# Altium PCB SENSEI_Base-Board_Clean.PcbDoc (part 1 of 7)
Units mm, origin at the board's own origin, x right, y up, seen from the top; angles counter-clockwise.
Board outline 25.2 x 15.15 mm, 8 copper layers (Top Sig/Pwr, GND1, Sig1, GND2, Sig2, Pwr, GND3, Bot Sig/Pwr), stack 1.53 mm thick; 187 components, 192 nets, 951 pads, 1831 vias.
Unrouted connection lines stored in the file: 214.
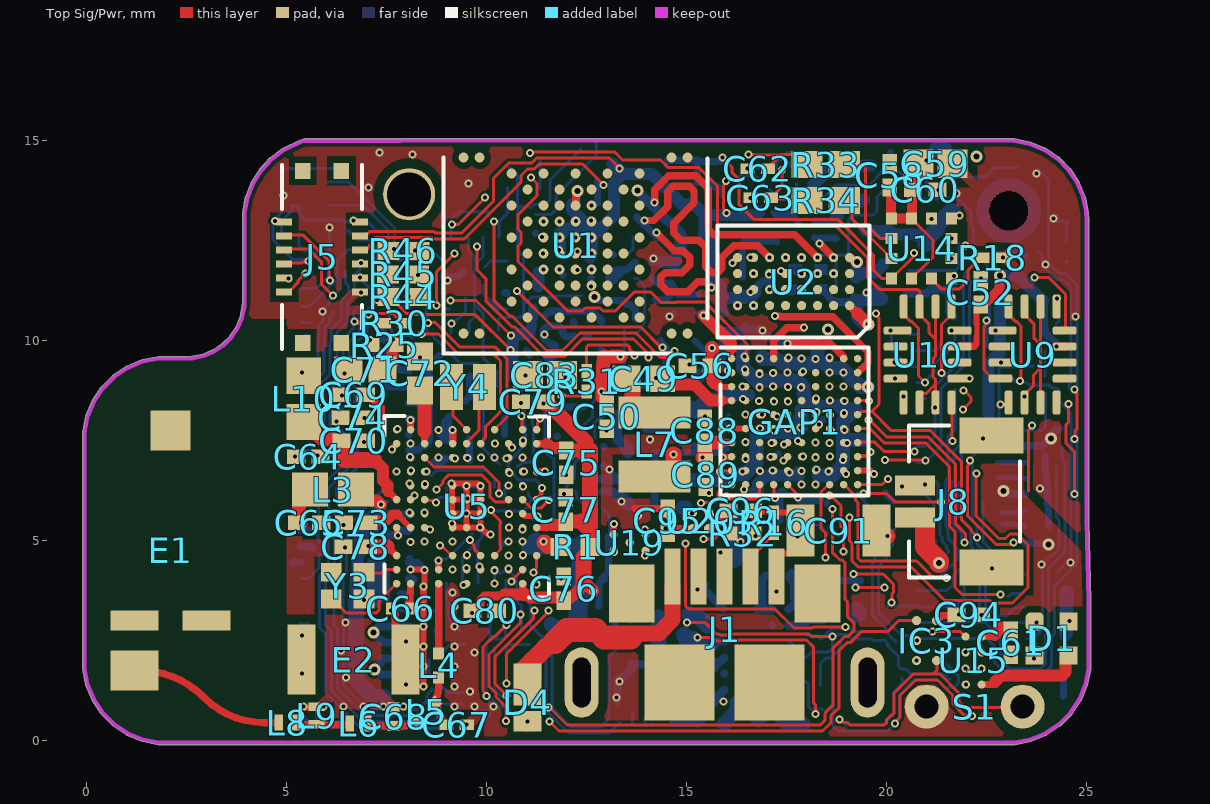
[diagram p0: Top Sig/Pwr view]
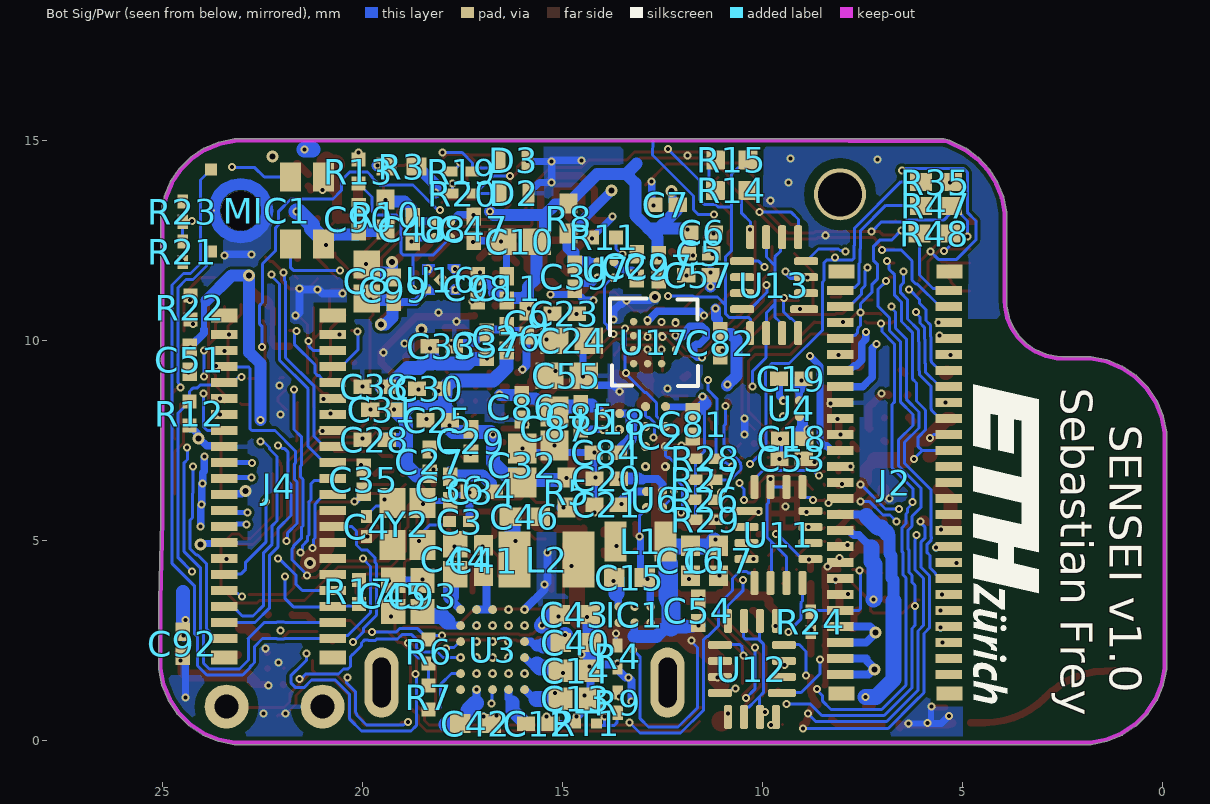
[diagram p1: Bot Sig/Pwr view, seen from below]
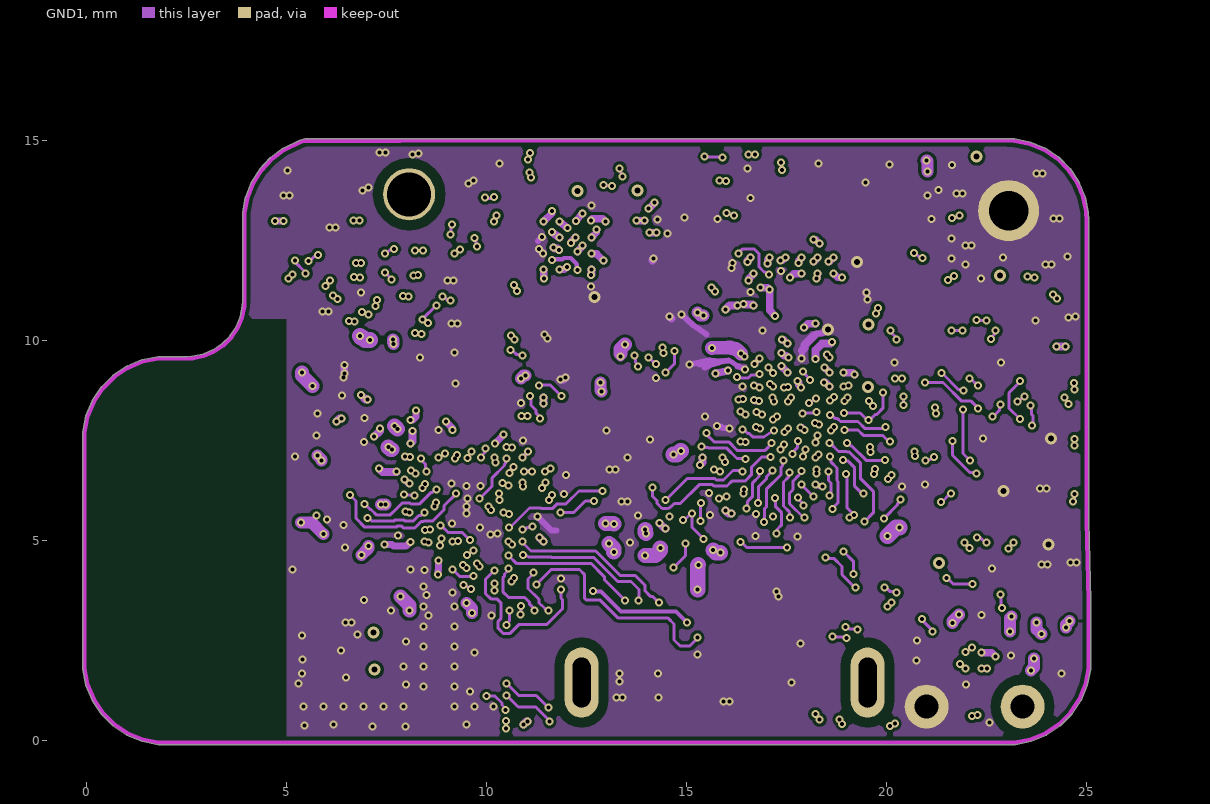
[diagram p2: GND1]
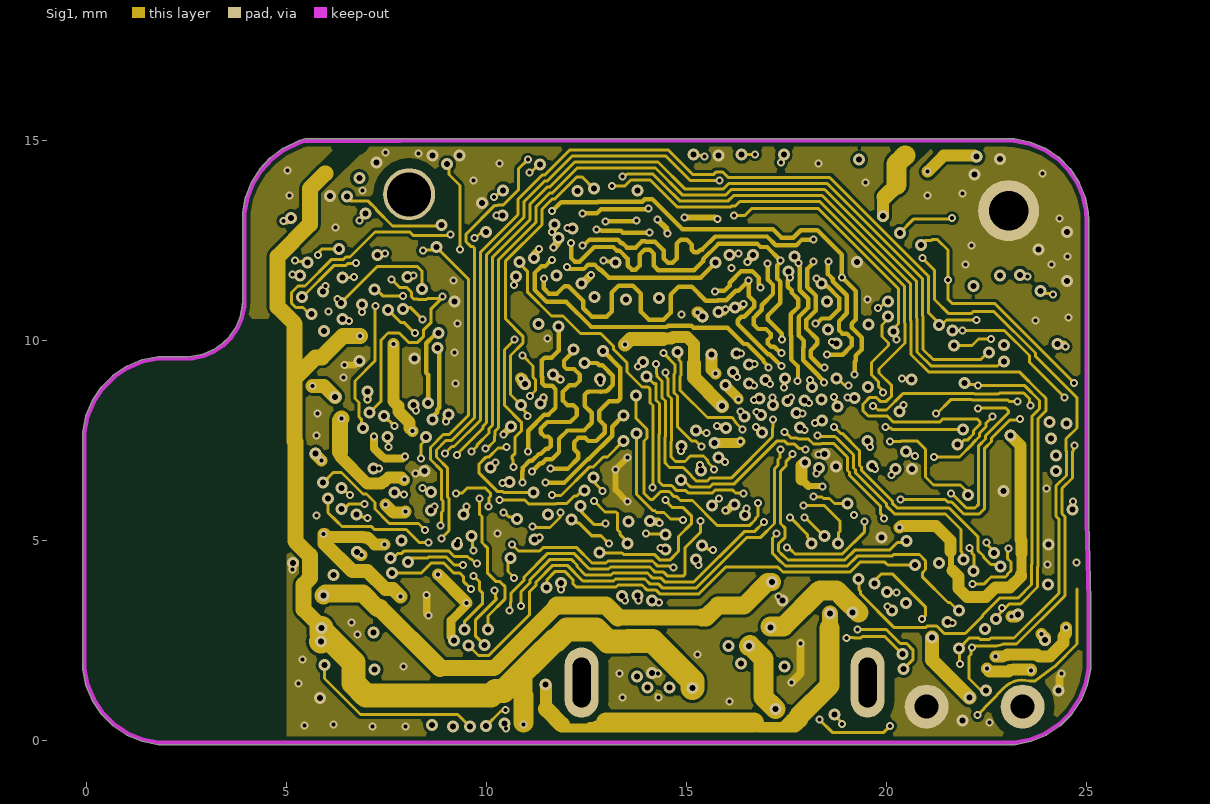
[diagram p3: Sig1]
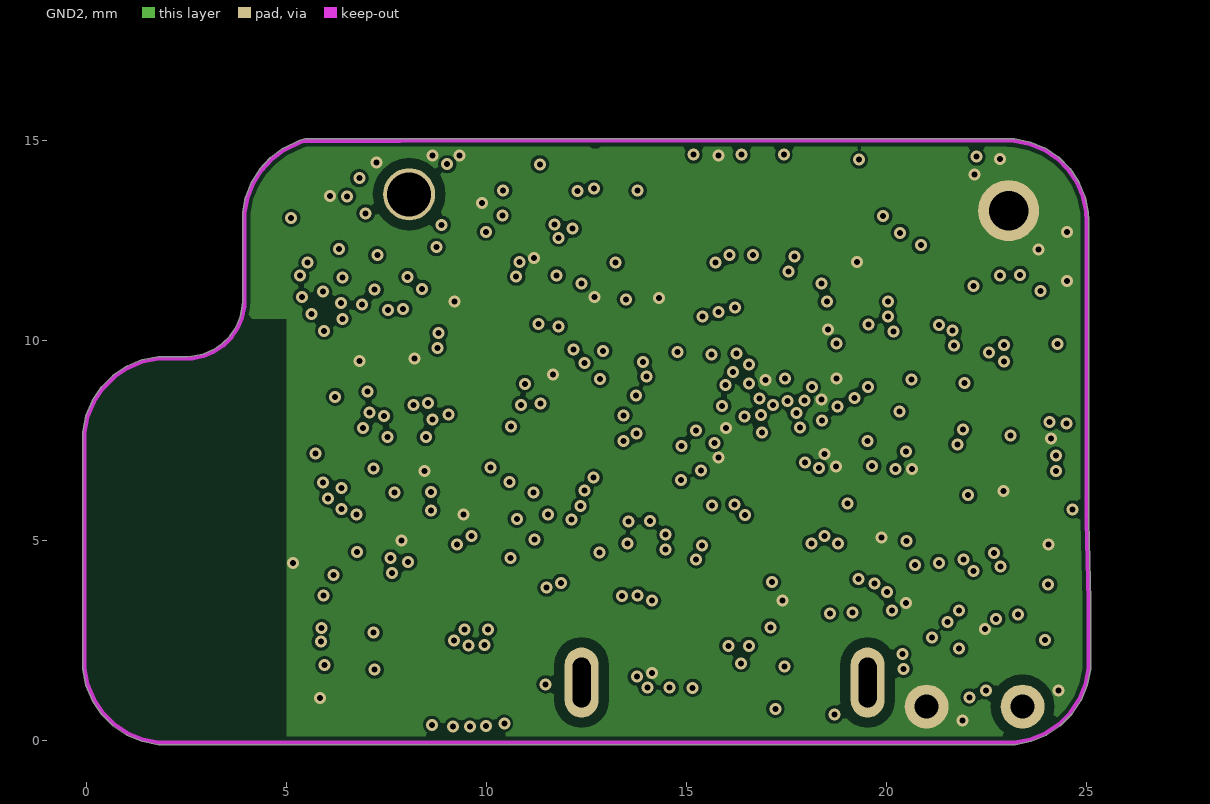
[diagram p4: GND2]
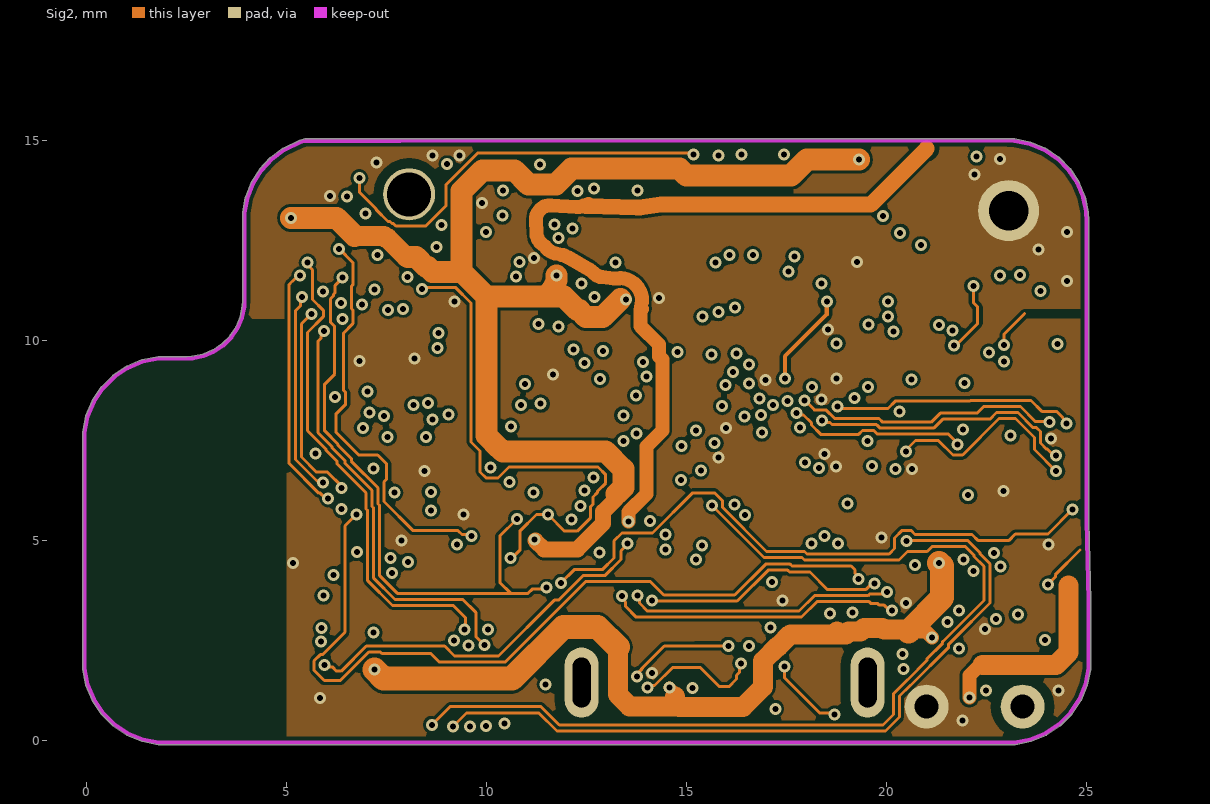
[diagram p5: Sig2]
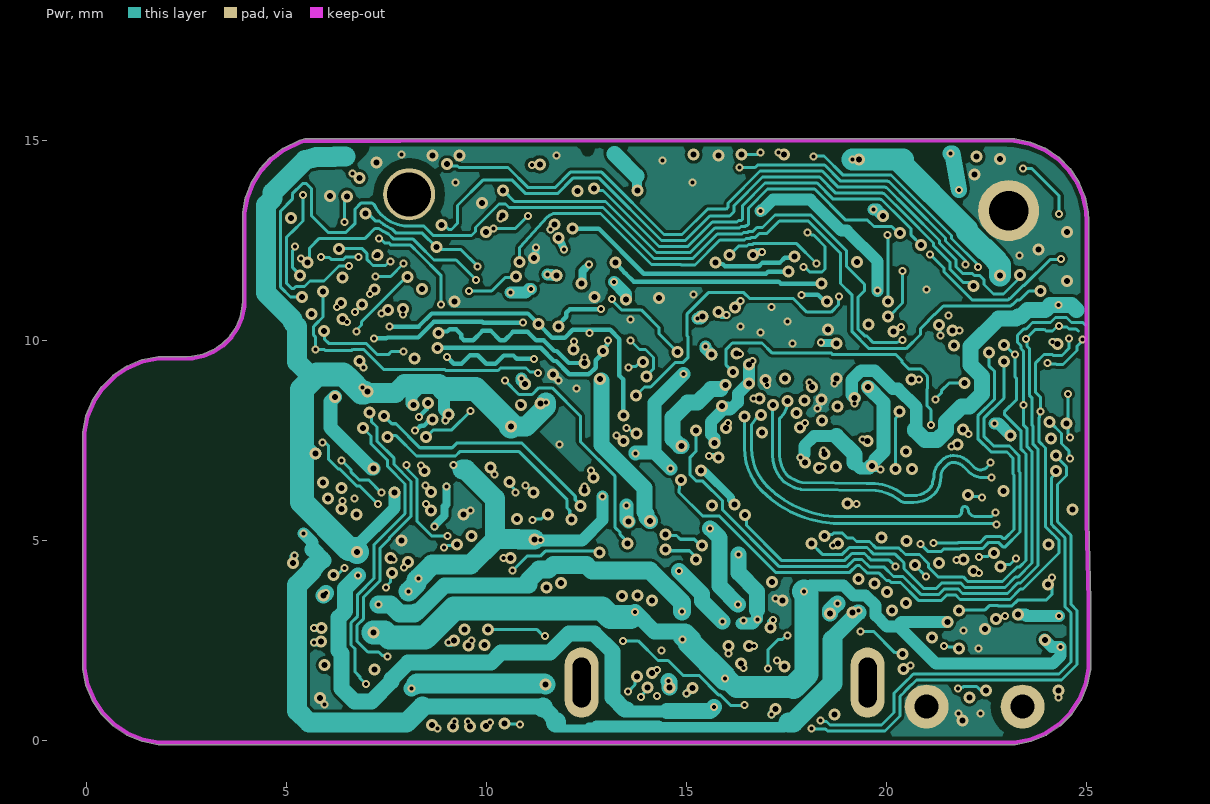
[diagram p6: Pwr]
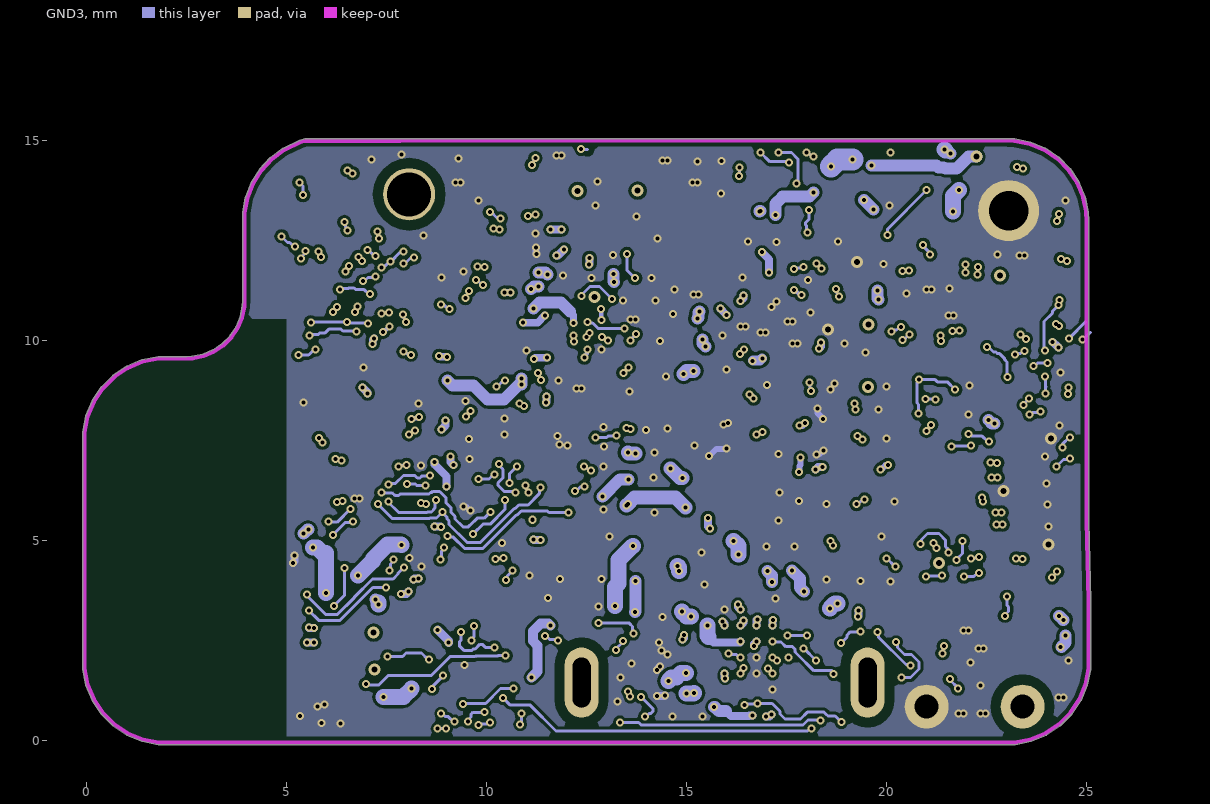
[diagram p7: GND3]

## Layer stack, top to bottom
F.Mask: solder mask 0.0102, Solder Resist, Dk 3.5
Top Sig/Pwr: signal copper 0.035
Dielectric 1: prepreg 0.11, PP-006, Dk 4.29
GND1: signal copper 0.035
Dielectric 2: prepreg 0.11, PP-006, Dk 4.29
Sig1: signal copper 0.035
Dielectric 3: core 0.35, Core-031, Dk 4.4
GND2: signal copper 0.035
Dielectric 4: prepreg 0.11, FR-4, Dk 4.29
Sig2: signal copper 0.035
Dielectric 5: core 0.35, Core-031, Dk 4.4
Pwr: signal copper 0.035
Dielectric 6: prepreg 0.11, PP-006, Dk 4.29
GND3: signal copper 0.035
Dielectric 7: prepreg 0.11, PP-006, Dk 4.29
Bot Sig/Pwr: signal copper 0.035
B.Mask: solder mask 0.0102, Solder Resist, Dk 3.5

## Board outline
-0.021,1.392 -0.1,1.788 cw(c-0.05,1.798) -0.101,1.798 -0.101,2 -0.101,7.5 -0.101,7.702 cw(c-0.05,7.702) -0.1,7.712 -0.021,8.108 cw(c0.028,8.098) -0.018,8.118 0.136,8.49 cw(c0.183,8.471) 0.141,8.499 0.365,8.835 cw(c0.407,8.807) 0.366,8.835 0.365,8.835 cw(c0.407,8.807) 0.372,8.843 0.657,9.128 cw(c0.693,9.093) 0.665,9.135 1.001,9.359 ccw(c1.029,9.317) 1.001,9.359 cw(c1.029,9.317) 1.01,9.364 1.382,9.518 cw(c1.402,9.472) 1.392,9.521 1.788,9.6 cw(c1.798,9.55) 1.798,9.601 2,9.601 2.499,9.601 2.636,9.608 2.906,9.661 3.159,9.766 3.388,9.919 3.581,10.112 3.734,10.341 3.839,10.594 3.892,10.864 3.899,11.001 3.899,13.192 cw(c3.95,13.192) 3.9,13.202 3.972,13.58 cw(c4.021,13.571) 3.974,13.589 4.115,13.947 cw(c4.162,13.929) 4.119,13.956 4.324,14.281 cw(c4.367,14.255) 4.324,14.282 cw(c4.367,14.255) 4.33,14.289 4.592,14.571 cw(c4.629,14.537) 4.592,14.571 cw(c4.629,14.537) 4.599,14.577 4.909,14.805 cw(c4.939,14.765) 4.909,14.806 4.909,14.805 cw(c4.939,14.765) 4.917,14.81 5.33,15.009 cw(c5.352,14.963) 5.339,15.012 5.458,15.044 cw(c5.472,14.995) 5.459,15.044 cw(c5.472,14.995) 5.472,15.046 7.838,15.046 12,15.05 cw(c12,15) 12,15.05 14,15.05 ccw(c14,15) 13.999,15.05 14,15.05 20,15.05 21.901,15.05 23,15.05 cw(c23,15) 23.002,15.05 23.003,15.05 23.002,15.05 cw(c23,15) 23.003,15.05 23.198,15.041 23.199,15.041 ccw(c23.196,14.99) 23.198,15.041 23.199,15.041 cw(c23.196,14.99) 23.206,15.04 23.59,14.963 cw(c23.581,14.914) 23.6,14.96 23.962,14.81 cw(c23.943,14.764) 23.971,14.806 cw(c23.943,14.764) 23.971,14.806 24.297,14.588 cw(c24.269,14.546) 24.297,14.588 cw(c24.269,14.546) 24.305,14.581 24.304,14.582 24.582,14.304 24.581,14.305 cw(c24.546,14.269) 24.588,14.297 cw(c24.546,14.269) 24.588,14.297 24.806,13.971 cw(c24.764,13.943) 24.806,13.971 cw(c24.764,13.943) 24.81,13.962 24.96,13.6 cw(c24.914,13.581) 24.963,13.59 25.04,13.206 cw(c24.99,13.196) 25.041,13.199 25.041,13.198 25.041,13.199 cw(c24.99,13.196) 25.041,13.198 25.05,13.003 cw(c25,13) 25.05,13.002 25.05,13.003 25.05,13.002 cw(c25,13) 25.05,13 25.05,9.5 ccw(c25,9.5) 25.05,9.501 25.05,9.5 25.05,5.501 25.101,3.501 cw(c25.05,3.5) 25.101,3.5 25.101,1.999 cw(c25.05,1.999) 25.101,1.999 25.101,1.798 ccw(c25.05,1.798) 25.101,1.798 cw(c25.05,1.798) 25.1,1.788 cw(c25.05,1.798) 25.1,1.788 25.021,1.392 ccw(c24.971,1.402) 25.021,1.392 cw(c24.971,1.402) 25.018,1.382 24.863,1.009 cw(c24.817,1.028) 24.859,1 24.635,0.665 24.634,0.665 24.635,0.665 cw(c24.592,0.693) 24.628,0.657 24.342,0.372 cw(c24.307,0.407) 24.335,0.365 cw(c24.307,0.407) 24.335,0.365 23.999,0.141 cw(c23.971,0.183) 23.99,0.136 23.617,-0.018 cw(c23.598,0.028) 23.608,-0.021 23.212,-0.1 cw(c23.202,-0.05) 23.202,-0.101 1.798,-0.101 cw(c1.798,-0.05) 1.788,-0.1 1.392,-0.021 cw(c1.402,0.028) 1.383,-0.018 1.009,0.136 cw(c1.029,0.183) 1.001,0.141 cw(c1.029,0.183) 1.001,0.141 0.665,0.365 cw(c0.693,0.407) 0.665,0.366 0.665,0.365 cw(c0.693,0.407) 0.657,0.372 0.372,0.657 cw(c0.407,0.693) 0.365,0.665 0.366,0.665 cw(c0.407,0.693) 0.365,0.665 0.141,1.001 cw(c0.183,1.029) 0.141,1.001 cw(c0.183,1.029) 0.136,1.01 -0.018,1.383 cw(c0.028,1.402)

## Design rules (kind name [scope] priority, off if disabled: settings)
BoardOutlineClearance [All   And  Not   OnSilkscreen] p1: gap=0.2 ignorepadtopadclearanceinfootprint=FALSE except(0.15: Text-OutlineEdge Text-CavityEdge Text-CutoutEdge Text-SplitBarrior Text-SplitContinuation)
Clearance Clearance_MEM [InNetClass('O_SPI') vs InNetClass('O_SPI')] p1: gap=0.075 ignorepadtopadclearanceinfootprint=TRUE
Clearance Clearance_HS [(OnLayer('Top Layer')) AND (InNetClass('HS_OUT')) vs (OnLayer('Top Layer')) AND (InNetClass('HS_OUT'))] p2: gap=0.09 ignorepadtopadclearanceinfootprint=TRUE except(0.18: Arc-Arc Arc-Track Track-Track)
Clearance [All] p3: gap=0.075 ignorepadtopadclearanceinfootprint=TRUE except(0: Arc-Hole Track-Hole SMDPad-Hole THPad-Hole Via-Hole Fill-Hole Poly-Hole Region-Hole Text-Hole; 0.12: SMDPad-Text; 0.15: Fill-Fill Fill-Poly Fill-Region Poly-Poly Poly-Region Region-Region; 0.16: SMDPad-Fill SMDPad-Poly SMDPad-Region; 0.2: Arc-Text Track-Text Via-Text Fill-Text Poly-Text Region-Text Text-Text; 0.25: THPad-THPad THPad-Via THPad-Fill THPad-Poly THPad-Region THPad-Text; 0.5: SMDPad-THPad)
ComponentClearance [All] p1: gap=0.2 collisioncheckmode=3 verticalgap=0.2 showdistances=FALSE
DiffPairsRouting DiffPair_CSI2_CLK [InDifferentialPair('CSI_CLK')] p1: maxlimit=0.203 minlimit=0.1 mostfreqgap=0.203 toplayer_maxgap=0.136 toplayer_prefgap=0.136 toplayer_minwidth=0.125 toplayer_maxwidth=0.125 toplayer_prefwidth=0.125 midlayer1_minwidth=0.075 midlayer1_maxwidth=0.381 midlayer1_prefwidth=0.075 midlayer2_minwidth=0.381 midlayer2_maxwidth=0.381 midlayer2_prefwidth=0.381 midlayer3_minwidth=0.381 midlayer3_maxwidth=0.381 midlayer3_prefwidth=0.381 midlayer4_minwidth=0.075 midlayer4_maxwidth=0.381 midlayer4_prefwidth=0.075 midlayer5_maxgap=0.184 midlayer5_prefgap=0.184 midlayer5_minwidth=0.075 midlayer5_maxwidth=0.075 midlayer5_prefwidth=0.075 midlayer6_maxgap=0.184 midlayer6_prefgap=0.184 midlayer6_minwidth=0.075 midlayer6_maxwidth=0.075 midlayer6_prefwidth=0.075 bottomlayer_maxgap=0.136 bottomlayer_prefgap=0.136 bottomlayer_minwidth=0.125 bottomlayer_maxwidth=0.125 bottomlayer_prefwidth=0.125 maxuncoupledlength=5
DiffPairsRouting DiffPair_CSI2_DO [InDifferentialPair('CSI_D0')] p2: maxlimit=0.203 minlimit=0.1 mostfreqgap=0.203 toplayer_maxgap=0.136 toplayer_prefgap=0.136 toplayer_minwidth=0.125 toplayer_maxwidth=0.125 toplayer_prefwidth=0.125 midlayer1_minwidth=0.075 midlayer1_maxwidth=0.381 midlayer1_prefwidth=0.381 midlayer2_minwidth=0.381 midlayer2_maxwidth=0.381 midlayer2_prefwidth=0.381 midlayer3_minwidth=0.381 midlayer3_maxwidth=0.381 midlayer3_prefwidth=0.381 midlayer4_minwidth=0.075 midlayer4_maxwidth=0.381 midlayer4_prefwidth=0.381 midlayer5_maxgap=0.184 midlayer5_prefgap=0.184 midlayer5_minwidth=0.075 midlayer5_maxwidth=0.075 midlayer5_prefwidth=0.075 midlayer6_maxgap=0.184 midlayer6_prefgap=0.184 midlayer6_minwidth=0.075 midlayer6_maxwidth=0.075 midlayer6_prefwidth=0.075 bottomlayer_maxgap=0.136 bottomlayer_prefgap=0.136 bottomlayer_minwidth=0.125 bottomlayer_maxwidth=0.125 bottomlayer_prefwidth=0.125 maxuncoupledlength=5
DiffPairsRouting DiffPair_CSI2_USB_1 [InDifferentialPair('EXTUSB')] p3: maxlimit=0.203 minlimit=0.127 mostfreqgap=0.203 toplayer_maxgap=0.127 toplayer_prefgap=0.127 toplayer_minwidth=0.156 toplayer_maxwidth=0.156 toplayer_prefwidth=0.156 midlayer5_maxgap=0.127 midlayer5_prefgap=0.127 midlayer5_minwidth=0.079 midlayer5_maxwidth=0.079 midlayer5_prefwidth=0.079 midlayer6_maxgap=0.127 midlayer6_prefgap=0.127 midlayer6_minwidth=0.079 midlayer6_maxwidth=0.079 midlayer6_prefwidth=0.079 bottomlayer_maxgap=0.127 bottomlayer_prefgap=0.127 bottomlayer_minwidth=0.156 bottomlayer_maxwidth=0.156 bottomlayer_prefwidth=0.156 impedanceprofiledriven=TRUE impedanceprofileid={DDCD8725-2C66-4836-9DB9-9B7CF1118B1B} impedanceprofilevalue=90.000000 maxuncoupledlength=5
DiffPairsRouting DiffPair_CSI2_USB_2 [InDifferentialPair('USB')] p4: maxlimit=0.203 minlimit=0.127 mostfreqgap=0.203 toplayer_maxgap=0.127 toplayer_prefgap=0.127 toplayer_minwidth=0.156 toplayer_maxwidth=0.156 toplayer_prefwidth=0.156 midlayer5_maxgap=0.127 midlayer5_prefgap=0.127 midlayer5_minwidth=0.079 midlayer5_maxwidth=0.079 midlayer5_prefwidth=0.079 midlayer6_maxgap=0.127 midlayer6_prefgap=0.127 midlayer6_minwidth=0.079 midlayer6_maxwidth=0.079 midlayer6_prefwidth=0.079 bottomlayer_maxgap=0.127 bottomlayer_prefgap=0.127 bottomlayer_minwidth=0.156 bottomlayer_maxwidth=0.156 bottomlayer_prefwidth=0.156 impedanceprofiledriven=TRUE impedanceprofileid={DDCD8725-2C66-4836-9DB9-9B7CF1118B1B} impedanceprofilevalue=90.000000 maxuncoupledlength=5
Height [All] p1: minheight=0 maxheight=27 prefheight=12.7
HoleSize [All] p1: absolutevalues=TRUE maxlimit=5 minlimit=0.1 maxpercent=80.000 minpercent=20.000
HoleToHoleClearance hole_blind_top [InDrillLayerPair('Top Sig/Pwr - GND1') vs InDrillLayerPair('Top Sig/Pwr - GND1')] p1: gap=0.2 allowstackedmicrovias=FALSE
HoleToHoleClearance hole_buried_top [InDrillLayerPair('GND1 - Sig1') vs InDrillLayerPair('GND1 - Sig1')] p2: gap=0.2 allowstackedmicrovias=FALSE
HoleToHoleClearance hole_buried_bottom [InDrillLayerPair('Pwr - GND3') vs InDrillLayerPair('Pwr - GND3')] p3: gap=0.2 allowstackedmicrovias=FALSE
HoleToHoleClearance hole_blind_bottom [InDrillLayerPair('GND3 - Bot Sig/Pwr') vs InDrillLayerPair('GND3 - Bot Sig/Pwr')] p4: gap=0.2 allowstackedmicrovias=FALSE
HoleToHoleClearance hole_buried_middle [InDrillLayerPair('GND1 - Sig1') vs InDrillLayerPair('Pwr - GND3')] p5: gap=0.3 allowstackedmicrovias=FALSE
HoleToHoleClearance hole_through_hole [InDrillLayerPair('Top Sig/Pwr - GND1') vs InDrillLayerPair('GND3 - Bot Sig/Pwr')] p6: gap=0.35 allowstackedmicrovias=FALSE
MatchedLengths [InNetClass('MEMORIES')] p1: tolerance=1 checknetsindiffpair=FALSE checkdiffpairvsdiffpair=TRUE checkxsignals=TRUE checkothers=TRUE
MatchedLengths MatchedLengths_HSOUT [InNetClass('HS_ML')] p2: tolerance=0.2 checknetsindiffpair=FALSE checkdiffpairvsdiffpair=TRUE checkxsignals=TRUE checkothers=TRUE
MatchedLengths MatchedLengths_HSIN [InNetClass('HS_ML2')] p3: tolerance=0.2 checknetsindiffpair=FALSE checkdiffpairvsdiffpair=TRUE checkxsignals=TRUE checkothers=TRUE
MatchedLengths MatchedLengths_MEMS_PP1 [InxSignalClass('MEMS_PP1')] p4: tolerance=0.1 checknetsindiffpair=FALSE checkdiffpairvsdiffpair=TRUE checkxsignals=TRUE checkothers=TRUE
MatchedLengths MatchedLengths_MEMS_PP2 [InxSignalClass('MEMS_PP2')] p5: tolerance=0.1 checknetsindiffpair=FALSE checkdiffpairvsdiffpair=TRUE checkxsignals=TRUE checkothers=TRUE
MatchedLengths MatchedLengths-diff_1 [InNetClass('CSI2')] p6: tolerance=0.01 checknetsindiffpair=FALSE checkdiffpairvsdiffpair=TRUE checkxsignals=TRUE checkothers=TRUE
MinimumSolderMaskSliver [All] p1: minsoldermaskwidth=0.1
PlaneClearance [All] p1: clearance=0.1
PolygonConnect PolygonConnect_4 [All vs IsNamedPolygon('GND_L08_P025')] p1: thpad.connectstyle=Relief thpad.reliefconductorwidth=0.1 thpad.reliefentries=4 thpad.polygonreliefangle="90 Angle" thpad.airgapwidth=0.254 smdpad.connectstyle=Relief smdpad.reliefconductorwidth=0.1 smdpad.reliefentries=4 smdpad.polygonreliefangle="90 Angle" smdpad.airgapwidth=0.254 via.connectstyle=Direct via.reliefconductorwidth=0.254 via.reliefentries=4 via.polygonreliefangle="90 Angle" via.airgapwidth=0.254
PolygonConnect PolygonConnect_3 [All vs IsNamedPolygon('GND_L08_P025')] p2: thpad.connectstyle=Relief thpad.reliefconductorwidth=0.1 thpad.reliefentries=4 thpad.polygonreliefangle="90 Angle" thpad.airgapwidth=0.254 smdpad.connectstyle=Relief smdpad.reliefconductorwidth=0.254 smdpad.reliefentries=4 smdpad.polygonreliefangle="90 Angle" smdpad.airgapwidth=0.254 via.connectstyle=Relief via.reliefconductorwidth=0.254 via.reliefentries=4 via.polygonreliefangle="90 Angle" via.airgapwidth=0.254
PolygonConnect [Not(OnBottomLayer Or OnTopLayer)] p3: connectstyle=Direct reliefconductorwidth=0.254 reliefentries=4 polygonreliefangle="45 Angle" airgapwidth=0.254
PolygonConnect PolygonConnect_1 [OnBottomLayer] p4: connectstyle=Relief reliefconductorwidth=0.254 reliefentries=4 polygonreliefangle="45 Angle" airgapwidth=0.254
PolygonConnect PolygonConnect_2 [OnTopLayer] p5: connectstyle=Relief reliefconductorwidth=0.254 reliefentries=4 polygonreliefangle="45 Angle" airgapwidth=0.254
RoutingVias via_through_hole [InDrillLayerPair('Top Sig/Pwr - Bot Sig/Pwr')] p1: holewidth=0.15 width=0.3 viastyle="Through Hole" minholewidth=0.15 minwidth=0.3 maxholewidth=0.15 maxwidth=0.3
RoutingVias via_blind_top [InDrillLayerPair('Top Sig/Pwr - GND1')] p2: holewidth=0.1 width=0.2 viastyle="Through Hole" minholewidth=0.1 minwidth=0.2 maxholewidth=0.1 maxwidth=0.2
RoutingVias via_buried_1 [InDrillLayerPair('GND1 - Sig1')] p3: holewidth=0.1 width=0.2 viastyle="Through Hole" minholewidth=0.1 minwidth=0.2 maxholewidth=0.1 maxwidth=0.2
RoutingVias via_buried_middle [InDrillLayerPair('Sig1 - Pwr')] p4: holewidth=0.15 width=0.3 viastyle="Through Hole" minholewidth=0.15 minwidth=0.3 maxholewidth=0.15 maxwidth=0.3
RoutingVias via_buried_2 [InDrillLayerPair('Pwr - GND3')] p5: holewidth=0.1 width=0.2 viastyle="Through Hole" minholewidth=0.1 minwidth=0.2 maxholewidth=0.1 maxwidth=0.2
RoutingVias via_blind_bottom [InDrillLayerPair('GND3 - Bot Sig/Pwr')] p6: holewidth=0.1 width=0.2 viastyle="Through Hole" minholewidth=0.1 minwidth=0.2 maxholewidth=0.1 maxwidth=0.2
SMDNeckDown [All] p1: percent=100.000
SilkToSilkClearance [All] p1: silktosilkclearance=0.1
SilkToSolderMaskClearance [IsPad] p1: minsilkscreentomaskgap=0.1 clearancetoexposedcopper=TRUE
SolderMaskExpansion SolderMaskExpansion_VIA [IsVia] p1: expansion=-0.1 istentingtop=FALSE useseparateexpansions=TRUE expansionbottom=-0.1 istentingbottom=FALSE
SolderMaskExpansion SolderMaskExpansion_1 [All] p2: expansion=0.05 istentingtop=FALSE
ViasUnderSMD [All] p1: allowed=TRUE
Width Width_1 [All] p1: maxlimit=6 minlimit=0.075 preferedwidth=0.075
Width width_50ohm_OSPI [InNetClass('O_SPI')] p2: maxlimit=0.185 minlimit=0.111 preferedwidth=0.185 toplayer_minwidth=0.185 toplayer_prefwidth=0.185 midlayer5_maxwidth=0.111 midlayer5_prefwidth=0.111 midlayer6_maxwidth=0.111 midlayer6_prefwidth=0.111 bottomlayer_minwidth=0.185 bottomlayer_prefwidth=0.185 impedanceprofiledriven=TRUE impedanceprofileid={85A6859E-D439-4C70-89F7-B2343958C511} impedanceprofilevalue=50.000000 minimp=50.000000 maximp=50.000000 favimp=50.000000
Width width_50ohm_QSPI [InNetClass('Q_SPI')] p3: maxlimit=0.185 minlimit=0.111 preferedwidth=0.185 toplayer_minwidth=0.185 toplayer_prefwidth=0.185 midlayer5_maxwidth=0.111 midlayer5_prefwidth=0.111 midlayer6_maxwidth=0.111 midlayer6_prefwidth=0.111 bottomlayer_minwidth=0.185 bottomlayer_prefwidth=0.185 impedanceprofiledriven=TRUE impedanceprofileid={85A6859E-D439-4C70-89F7-B2343958C511} impedanceprofilevalue=50.000000 minimp=50.000000 maximp=50.000000 favimp=50.000000
Width width_50ohm_antenna [InNetClass('50OHM')] p4: maxlimit=0.185 minlimit=0.111 preferedwidth=0.185 toplayer_minwidth=0.185 toplayer_prefwidth=0.185 midlayer5_maxwidth=0.111 midlayer5_prefwidth=0.111 midlayer6_maxwidth=0.111 midlayer6_prefwidth=0.111 bottomlayer_minwidth=0.185 bottomlayer_prefwidth=0.185 impedanceprofiledriven=TRUE impedanceprofileid={85A6859E-D439-4C70-89F7-B2343958C511} impedanceprofilevalue=50.000000 minimp=50.000000 maximp=50.000000 favimp=50.000000
Width Width_100Ohms_1 [InNetClass('CSI2xxx')] p5: maxlimit=0.1 minlimit=0.094 preferedwidth=0.094 toplayer_maxwidth=0.094 midlayer1_minwidth=0.094 midlayer2_minwidth=0.094 midlayer3_minwidth=0.094 midlayer4_minwidth=0.094 midlayer5_minwidth=0.1 midlayer5_prefwidth=0.1 midlayer6_minwidth=0.1 midlayer6_prefwidth=0.1 bottomlayer_minwidth=0.094 bottomlayer_maxwidth=0.094 minimp=50.000000 maximp=50.000000 favimp=50.000000
21 further rules are at their usual default settings.

## Classes and differential pairs
net class Q_SPI: nRF_QSPI_CLK nRF_QSPI_IO0 nRF_QSPI_IO1 nRF_QSPI_IO2 nRF_QSPI_IO3
net class CSI2_DATA: CSI_D0_N CSI_D0_P
net class CSI2_CLK: CSI_CLK_N CSI_CLK_P
net class 50OHM: GND NetC67_1 NetC68_1 NetE1_1 NetL4_1 NetL6_2
component class 09_SHARED_PERIPHERAL: C58 C59 C60 C61 C62 C63 C92 D1 D2 D3 R18 R19 R20 R33 R34 U14 U15
component class 08_nRF_RAM: C82 C83 R31 U17
component class 05_GAP_MIC: C90 MIC1 R17 R21 R23
component class 07_nRF_GPIO: C81 IC2 R26 R27 R28 R29 R30 Y4
component class 04_GAP_GPIO: C51 C52 C53 C54 C57 R14 R15 U9 U10 U11 U12 U13
component class 10_CONNECTOR: D4 J1 J2 J4 J5 J8 R16 R35 R44 R45 R46 R47 R48 U19
component class 06_nRF_POWER_SWD_RF: C64 C65 C66 C67 C68 C69 C70 C71 C72 C73 C74 C75 C76 C77 C78 C79 C80 E1 E2 L3 L4 L5 L6 L8 L9 L10 R24 R25 U5 Y3
component class 02_GAP_JTAG_XTALs: C3 C4 R22 Y2
net class O_SPI: OSPI_0 OSPI_1 OSPI_2 OSPI_3 OSPI_4 OSPI_5 OSPI_6 OSPI_7 OSPI_CLK OSPI_DS
component class 03_GAP_MEM: C5 C6 C7 C8 C9 C10 C11 C97 C98 C99 R12 U1 U2 U16
component class 01_GAP_POWER: C23 C24 C25 C26 C27 C28 C29 C30 C31 C32 C33 C34 C35 C36 C37 C38 C49 C50 C55 C56 C86 C87 C88 C89 GAP1 L7
component class 00_POWER: C12 C13 C14 C15 C16 C17 C18 C19 C20 C21 C22 C39 C40 C41 C42 C43 C44 C45 C46 C47 C48 C84 C85 C91 C93 C94 C95 C96 IC1 IC3 L1 L2 R1 R3 R4 R5 R6 R7 R8 R9 R10 R11 R13 R32 RT1 S1 U3 U4 U6 U7 U8 U18 U20
differential pair EXTUSB: +EXTUSB_P -EXTUSB_N
differential pair CSI_D0: +CSI_D0_P -CSI_D0_N
differential pair CSI_CLK: +CSI_CLK_P -CSI_CLK_N
differential pair USB: +USB_P -USB_N

## Components (designator, comment, footprint, x,y, rotation, side; value= is the part's Value field where it differs from the comment)
C3 "CBR02C200F5GAC" CAPC6333_33N_KEM-L 17.574,5.475 r180 bottom
C4 "CBR02C200F5GAC" CAPC6333_33N_KEM-L 19.9,5.351 r270 bottom
C5 "CL03A105KP3NSNC" FP-CL03-IPC_B 11.587,12.18 r180 bottom
C6 "CL03A105KP3NSNC" FP-CL03-IPC_B 11.524,12.691 r180 bottom
C7 "CL03A105KP3NSNC" FP-CL03-IPC_B 12.425,13.4 r0 bottom
C8 "C1005X5R0J475K050BC" FP-C1005-050-0_15-IPC_B 19.9,11.477 r90 bottom
C9 "GRM033Z71C104KE14D" FP-GRM033-0_03-IPC_B 15.9,10.429 r270 bottom
C10 "C1005X5R0J475K050BC" FP-C1005-050-0_15-IPC_B 16.075,12.475 r0 bottom
C11 "GRM033Z71C104KE14D" FP-GRM033-0_03-IPC_B 16.4,11.304 r90 bottom
C12 "CL03A105KP3NSNC" FP-CL03-IPC_B 15.612,0.425 r180 bottom
C13 "C1005X5R0J475K050BC" FP-C1005-050-0_15-IPC_C 14.675,1.05 r180 bottom
C14 "C1005X5R0J475K050BC" FP-C1005-050-0_15-IPC_C 14.675,1.75 r180 bottom
C15 "CL05A226MQ5QUNC" FP-CL746-IPC_C 13.326,4.073 r180 bottom
C16 "CL05A226MQ5QUNC" FP-CL746-IPC_C 11.8,4.496 r270 bottom
C17 "CL05A226MQ5QUNC" FP-CL746-IPC_C 11.1,4.496 r270 bottom
C18 "CL03A105KP3NSNC" FP-CL03-IPC_B 9.263,7.551 r0 bottom
C19 "GRM033Z71C104KE14D" FP-GRM033-0_03-IPC_B 9.283,9.045 r0 bottom
C20 "CL03A105KP3NSNC" FP-CL03-IPC_B 13.9,6.55 r0 bottom
C21 "GRM033Z71C104KE14D" FP-GRM033-0_03-IPC_B 13.9,5.9 r0 bottom
C22 "CL03A105KP3NSNC" FP-CL03-IPC_B 13.15,11.854 r90 bottom
C23 "CL03A105KP3NSNC" FP-CL03-IPC_B 14.95,10.675 r180 bottom
C24 "C1005X5R0J475K050BC" FP-C1005-050-0_15-IPC_B 14.775,10 r180 bottom
C25 "GRM033Z71C104KE14D" FP-GRM033-0_03-IPC_B 18.119,8.011 r0 bottom
C26 "GRM033Z71C104KE14D" FP-GRM033-0_03-IPC_B 16.4,10.054 r90 bottom
C27 "GRM033Z71C104KE14D" FP-GRM033-0_03-IPC_B 18.319,6.974 r90 bottom
C28 "GRM033Z71C104KE14D" FP-GRM033-0_03-IPC_B 19.7,7.525 r0 bottom
C29 "GRM033Z71C104KE14D" FP-GRM033-0_03-IPC_B 17.29,7.48 r270 bottom
C30 "GRM033Z71C104KE14D" FP-GRM033-0_03-IPC_B 18.332,8.796 r0 bottom
C31 "GRM033Z71C104KE14D" FP-GRM033-0_03-IPC_B 19.503,8.268 r0 bottom
C32 "CL05A106MP5NUNC" FP-CL05A106MP5NUNC-IPC_B 16.007,6.878 r90 bottom value=10uF
C33 "GRM033Z71C104KE14D" FP-GRM033-0_03-IPC_B 18.015,9.856 r180 bottom
C34 "GRM033Z71C104KE14D" FP-GRM033-0_03-IPC_B 17.017,6.227 r0 bottom
C35 "GRM033Z71C104KE14D" FP-GRM033-0_03-IPC_B 19.975,6.525 r270 bottom
C36 "GRM033Z71C104KE14D" FP-GRM033-0_03-IPC_B 17.808,6.293 r270 bottom
C37 "GRM033Z71C104KE14D" FP-GRM033-0_03-IPC_B 16.9,9.9 r90 bottom
C38 "GRM033Z71C104KE14D" FP-GRM033-0_03-IPC_B 19.702,8.846 r0 bottom
C39 "GRM033Z71C104KE14D" FP-GRM033-0_03-IPC_B 14.7,11.6 r270 bottom
C40 "CL05A226MQ5QUNC" FP-CL746-IPC_C 14.671,2.45 r180 bottom
C41 "CL05A226MQ5QUNC" FP-CL746-IPC_C 16.975,4.5 r90 bottom
C42 "CL05A226MQ5QUNC" FP-CL746-IPC_C 17.175,0.425 r0 bottom
C43 "CL05A226MQ5QUNC" FP-CL746-IPC_C 14.696,3.15 r180 bottom
C44 "CL05A106MP5NUNC" FP-CL05A106MP5NUNC-IPC_C 17.684,4.531 r90 bottom value=10uF
C45 "GRM155C70J225KE11D" FP-GRM155-0_2-IPC_C 19.234,3.618 r90 bottom
C46 "GRM033R71E332KA12D" FP-GRM033-0_03-IPC_A 15.95,5.6 r180 bottom
C47 "CL03A105KP3NSNC" FP-CL03-IPC_B 17.225,12.8 r270 bottom
C48 "GRM033Z71C104KE14D" FP-GRM033-0_03-IPC_B 18.75,12.779 r270 bottom
C49 "C1005X5R0J475K050BC" FP-C1005-050-0_15-IPC_B 13.925,9.05 r0 top
C50 "GRM033Z71C104KE14D" FP-GRM033-0_03-IPC_B 13,8.1 r270 top
C51 "CL03A105KP3NSNC" FP-CL03-IPC_B 24.317,9.525 r270 bottom
C52 "CL03A105KP3NSNC" FP-CL03-IPC_B 22.35,11.204 r90 top
C53 "CL03A105KP3NSNC" FP-CL03-IPC_B 9.276,7.046 r0 bottom
C54 "CL03A105KP3NSNC" FP-CL03-IPC_B 11.604,3.242 r90 bottom
C55 "C1005X5R0J475K050BC" FP-C1005-050-0_15-IPC_B 14.9,9.125 r180 bottom
C56 "GRM033Z71C104KE14D" FP-GRM033-0_03-IPC_B 15.325,9.375 r180 top
C57 "CL03A105KP3NSNC" FP-CL03-IPC_B 11.605,11.635 r0 bottom
C58 "GRM033Z71C104KE14D" FP-GRM033-0_03-IPC_B 20.08,14.129 r90 top
C59 "CL05A106MP5NUNC" FP-CL05A106MP5NUNC-IPC_B 21.22,14.423 r0 top value=10uF
C60 "GRM033Z71C104KE14D" FP-GRM033-0_03-IPC_B 20.967,13.775 r0 top
C61 "GRM033Z71C104KE14D" FP-GRM033-0_03-IPC_B 23.1,2.45 r270 top
C62 "GRM0335C1H111JA01D" FP-GRM033-0_03-IPC_C 16.777,14.3 r180 top
C63 "GRM0335C1H111JA01D" FP-GRM033-0_03-IPC_C 16.86,13.573 r180 top
C64 "CL03A105KP3NSNC" FP-CL03-IPC_B 5.546,7.1 r180 top
C65 "CL03A105KP3NSNC" FP-CL03-IPC_B 5.56,5.45 r0 top
C66 "GRM033R71C222KA88D" FP-GRM033-0_03-MFG 7.85,3.3 r180 top
C67 "GJM0335C1ER70BB01D" FP-GJM033-0_03-IPC_C 9.25,0.4 r0 top
C68 "DNF" FP-GRM033-0_03-MFG 7.675,0.6 r90 top
C69 "CL03A105KP3NSNC" FP-CL03-IPC_B 6.675,8.65 r180 top
C70 "CL03A105KP3NSNC" FP-CL03-IPC_B 6.675,7.5 r0 top
C71 "C1005X5R0J475K050BC" FP-C1005-050-0_15-IPC_B 6.966,9.267 r180 top
C72 "C1005X5R0J475K050BC" FP-C1005-050-0_15-IPC_B 8.335,9.177 r90 top
C73 "GRM033Z71C104KE14D" FP-GRM033-0_03-IPC_B 6.735,5.45 r180 top
C74 "CL03A105KP3NSNC" FP-CL03-IPC_B 6.65,8.075 r0 top
C75 "GRM033Z71C104KE14D" FP-GRM033-0_03-IPC_B 11.985,6.95 r270 top
C76 "GRM033Z71C104KE14D" FP-GRM033-0_03-IPC_B 11.925,3.8 r90 top
C77 "GRM033Z71C104KE14D" FP-GRM033-0_03-IPC_B 11.975,5.775 r90 top
C78 "GRM033Z71C104KE14D" FP-GRM033-0_03-IPC_B 6.725,4.85 r180 top
C79 "GRM033Z71C104KE14D" FP-GRM033-0_03-IPC_B 11.166,8.474 r180 top
C80 "GRM033Z71C104KE14D" FP-GRM033-0_03-IPC_B 9.95,3.25 r0 top
C81 "GRM033Z71C104KE14D" FP-GRM033-0_03-IPC_B 11.75,7.904 r270 bottom
C82 "GRM033Z71C104KE14D" FP-GRM033-0_03-IPC_B 11.063,9.939 r270 bottom
C83 "CL05A106MP5NUNC" FP-CL05A106MP5NUNC-IPC_B 11.457,9.139 r0 top value=10uF
C84 "CL03A105KP3NSNC" FP-CL03-IPC_B 13.925,7.2 r0 bottom
C85 "GRM033Z71C104KE14D" FP-GRM033-0_03-IPC_B 14.55,8.104 r270 bottom
C86 "GRM033Z71C104KE14D" FP-GRM033-0_03-IPC_B 16.025,8.329 r270 bottom
C87 "CL05A106MP5NUNC" FP-CL05A106MP5NUNC-IPC_B 15.2,7.8 r270 bottom value=10uF
C88 "GRM033Z71C104KE14D" FP-GRM033-0_03-IPC_B 15.45,7.75 r90 top
C89 "GRM033Z71C104KE14D" FP-GRM033-0_03-IPC_B 15.475,6.646 r270 top
C90 "GRM033Z71C104KE14D" FP-GRM033-0_03-IPC_B 20.1,13.029 r90 bottom
C91 "GRM21BR60G107ME11L" FP-GRM21B-0_2-e0_2_0_7-MFG 18.8,5.25 r180 top
C92 "CL03A105KP3NSNC" FP-CL03-IPC_B 24.495,2.418 r270 bottom
C93 "GRM155C70J225KE11D" FP-GRM155-0_2-IPC_C 18.5,3.612 r90 bottom
C94 "GRM033Z71C104KE14D" FP-GRM033-0_03-IPC_B 22.054,3.15 r0 top
C95 "CL03A105KP3NSNC" FP-CL03-IPC_B 14.525,5.5 r90 top
C96 "GRM033Z71C104KE14D" FP-GRM033-0_03-IPC_B 16.354,5.75 r0 top
C97 "CL03A105KP3NSNC" FP-CL03-IPC_B 12.6,11.829 r270 bottom
C98 "GRM033Z71C104KE14D" FP-GRM033-0_03-IPC_B 17.125,11.304 r270 bottom
C99 "GRM033Z71C104KE14D" FP-GRM033-0_03-IPC_B 19.225,11.275 r90 bottom
D1 "SML-LX0404SIUPGUSB" SML-LX0404SIUPGUSB 24.125,2.55 r0 top
D2 "TPD1E01B04DPYRQ1" TPD1E01B04DPYRQ1 16.207,13.677 r180 bottom
D3 "TPD1E01B04DPYRQ1" TPD1E01B04DPYRQ1 16.221,14.502 r180 bottom
D4 "NSR20F30NXT5G" ONSC-DSN-2-512AB-01_V 11.025,1.125 r180 top
E1 "NN03-320" NN03-320 0.6,8.25 r90 top
E2 "DNM" U.FL-R-SMT-1(01)_GND_pad_small 5.375,2.025 r0 top
GAP1 "GAP9_MC" GAP9 17.7,7.975 r90 top
IC1 "MAX38643AENT+T" BGA6C40P3X2_142X89X50 13.2,3.15 r180 bottom
IC2 "TS5A3153YZPR" BGA8C50P2X4_89X189X50 12.675,7.6 r180 bottom
IC3 "TS5A3167YZPR" BGA5C50P2X3_89X139X50 21,2.5 r0 top
J1 "USB3076-30-A" CONN_USB3076-30-A_GCT 15.95,1.469 r0 top
J2 "DF40C-50DP-0.4V(51)" CONN_COMBI_50P 6.7,6.45 r0 bottom locked
J4 "DF40C-40DP-0.4V(51)" FP-DF40C-40DP-0_4V_51-MFG 22.1,6.35 r270 bottom
J5 "505066-1222" 5050661222 5.888,12.089 r270 top
J8 "DF52-2S-0.8H(21)" DF522S08H21 21.595,5.975 r90 top locked
L1 "DFE18SAN1R0ME0L" FP-DFE18SAN_E0-MFG 13.05,4.975 r180 bottom
L2 "DFE201210S-1R5M=P2" IND_0805_DFE201210S 15.4,4.525 r180 bottom
L3 "LQM18DN100M70L" FP-LQM18DN_70-IPC_C 6.159,6.275 r0 top
L4 "LQP03HQ2N2B02D" FP-LQP03HQ_02-MFG 8.8,1.875 r270 top
L5 "LQP03HQ2N2B02D" FP-LQP03HQ_02-MFG 8.487,0.712 r225 top
L6 "LQW03AW5N6J00D" FP-LQW03AW_00-MFG 6.8,0.425 r180 top
L7 "DFE201610E-4R7M=P2" FP-DFE201610C-MFG 14.2,7.4 r90 top
L8 "LQW03AW5N6J00D" FP-LQW03AW_00-MFG 5.02,0.45 r180 top
L9 "LQW03AW5N6J00D" FP-LQW03AW_00-MFG 5.75,0.625 r270 top
L10 "LQM18DN100M70L" FP-LQM18DN_70-IPC_C 5.426,8.544 r90 top
MIC1 "MMICT5838-00-012" MMICT5838-00-012 22.346,13.25 r180 bottom
R1 "CRCW04021R00FKEDHP" RESC1005X40X25LL05T10 12.224,4.833 r0 top value="1 Ohm"
R3 "CRCW04021R00FKEDHP" RESC1005X40X25LL05T10 19.025,14.35 r0 bottom value="1 Ohm"
R4 "RK73H1HTTC2202F" RESC0603X26X15LL03T05 13.625,2.1 r90 bottom
R5 "CRCW04021R00FKEDHP" RESC1005X40X25LL05T10 14.9,6.2 r90 bottom value="1 Ohm"
R6 "RC0201FR-07100KL" RESC0201(0603)_L 18.35,2.225 r270 bottom value=100k
R7 "RC0201FR-07100KL" RESC0201(0603)_L 18.35,1.075 r90 bottom value=100k
R8 "CRCW04021R00FKEDHP" RESC1005X40X25LL05T10 14.85,13.05 r90 bottom value="1 Ohm"
R9 "RMCF0201FT10K0" FP-RMCF0201-IPC_C 13.625,0.95 r90 bottom
R10 "CRCW04021R00FKEDHP" RESC1005X40X25LL05T10 19.425,13.15 r270 bottom value="1 Ohm"
R11 "ERJ-1GNJ105C" RESC0201(0603)_L 13.963,12.575 r180 bottom value=1M
R12 "ERJ-1GNJ105C" RESC0201(0603)_L 24.325,8.175 r90 bottom value=1M
R13 "ERJ-1GNJ105C" RESC0201(0603)_L 20.1,14.225 r270 bottom value=1M
R14 "RR0510P-104-D" FP-RR0510-IPC_C 10.775,13.751 r0 bottom
R15 "RR0510P-104-D" FP-RR0510-IPC_C 10.769,14.513 r0 bottom
R16 "DNM" 0201 17.175,5.45 r90 top
R17 "ERJ-1GNJ105C" RESC0201(0603)_L 20.093,3.72 r270 bottom value=1M
R18 "DNF" FP-RMCF0201-IPC_C 22.65,12.075 r180 top
R19 "ERJ-1GNF4990C" RESC0603X26X15LL03T05 17.525,14.225 r0 bottom
R20 "ERJ-1GNF4990C" RESC0603X26X15LL03T05 17.5,13.675 r0 bottom
R21 "DNF" FP-RMCF0201-IPC_C 24.5,12.221 r270 bottom locked
R22 "RC0201FR-07100KL" RESC0201(0603)_L 24.305,10.825 r90 bottom value="100000.00 Ohm"
R23 "RMCF0201ZT0R00" FP-RMCF0201-IPC_C 24.5,13.225 r270 bottom locked
R24 "RMCF0201FT10K0" FP-RMCF0201-IPC_C 8.8,2.967 r90 bottom
R25 "RC0201FR-072R2L" RESC0201(0603)_L 7.45,9.889 r180 top value=2.2R
R26 "RMCF0201FT10K0" FP-RMCF0201-IPC_C 11.446,6.025 r180 bottom
R27 "RMCF0201FT10K0" FP-RMCF0201-IPC_C 11.429,6.525 r180 bottom
R28 "RMCF0201FT10K0" FP-RMCF0201-IPC_C 11.425,7.05 r180 bottom
R29 "RMCF0201FT10K0" FP-RMCF0201-IPC_C 11.425,5.525 r180 bottom
R30 "DNF" FP-RMCF0201-IPC_C 7.689,10.434 r180 top
R31 "RMCF0201FT10K0" FP-RMCF0201-IPC_C 12.5,8.979 r270 top
R32 "ERJ-1GNJ105C" RESC0201(0603)_L 16.4,5.175 r180 top value=1M
R33 "RMCF0402ZT0R00" FP-RMCF0402-IPC_A 18.475,14.4 r0 top
R34 "RMCF0402ZT0R00" FP-RMCF0402-IPC_A 18.475,13.503 r0 top
R35 "CRCW020149R9FNED" RESC0603X28X15ML05T05 5.669,13.958 r0 bottom
R44 "CRCW020149R9FNED" RESC0603X28X15ML05T05 7.916,11.085 r180 top
R45 "CRCW020149R9FNED" RESC0603X28X15ML05T05 7.91,11.658 r180 top
R46 "CRCW020149R9FNED" RESC0603X28X15ML05T05 7.918,12.242 r0 top
R47 "CRCW020149R9FNED" RESC0603X28X15ML05T05 5.668,13.359 r0 bottom
R48 "CRCW020149R9FNED" RESC0603X28X15ML05T05 5.7,12.674 r180 bottom
RT1 "ERT-JZEG103FA" ERTJZEG103FA 14.412,0.425 r0 bottom
S1 "NanoT160BP" NanoT160BP 21,0.85 r0 top locked
U1 "MX25UM51345GBEI00" MX25UM51345GBEI00 12.225,12.375 r90 top
U2 "APS512XXN-OB9-WB" WLCSP32_APS512XXN-OB9-WB 17.675,11.475 r180 top locked
U3 "MAX77654BENV+T" WLP_30_MAX77654 17.55,1.275 r90 bottom
U4 "TPS22916CYFPR" BGA4C40P2X2_78X78X50 9.283,8.299 r270 bottom
U5 "NRF5340-CLAA-R7" NRF5340_WLCSP 9.5,5.85 r90 top locked
U6 "TPS22916CYFPR" BGA4C40P2X2_78X78X50 12.7,6.025 r180 bottom
U7 "TPS22916CYFPR" BGA4C40P2X2_78X78X50 13.919,11.768 r180 bottom
U8 "TPS22916CYFPR" BGA4C40P2X2_78X78X50 18,12.775 r180 bottom
U9 "TMUX1112RSVR" FP-RSV0016A-MFG 23.65,9.65 r0 top
U10 "TMUX1112RSVR" FP-RSV0016A-MFG 21.025,9.65 r0 top
U11 "TMUX1112RSVR" FP-RSV0016A-MFG 9.6,5.138 r180 bottom
U12 "TMUX1112RSVR" FP-RSV0016A-MFG 10.267,1.789 r0 bottom
U13 "TMUX1112RSVR" FP-RSV0016A-MFG 9.71,11.384 r0 bottom
U14 "LIS2DUXS12TR" QFN_DUXS12_STM 20.875,12.299 r90 top
U15 "IS31FL3194-CLS2-TR" WLCSP_8_P0.4 21.975,2.6 r0 top
U16 "74AUP1G32GX,125" SOT1226-3 18.032,11.525 r90 bottom
U17 "APS12804O-SQRH-WA" APS12804O-SQRH-WA 12.7,9.95 r180 bottom
U18 "TPS22916CYFPR" BGA4C40P2X2_78X78X50 13.775,7.975 r180 bottom
U19 "PESD1USB30Z" WLCSP_5_2-1-2_P0.4 13.575,4.95 r180 top
U20 "TPS22916CYFPR" BGA4C40P2X2_78X78X50 15.35,5.5 r180 top
Y2 "ECS-240-10-47Q-CES-TR" XTAL_ECS-240-10-47Q-CES-TR 18.883,5.412 r90 bottom
Y3 "ECS-320-7-48B-JTM-TR5" Y_ECX-1048 6.525,3.875 r0 top
Y4 "ECS-.327-9-1210-TR" FP-ECX-1210-MFG 9.531,8.839 r180 top

## Footprints (in the part's own frame and the unit in brackets; to place one, negate y for a bottom-side part, rotate by r counter-clockwise, add the part's x,y. Pads: shape width x height; smd on the part's side, far side on the other; paste and mask are expansions set on the pad)
0201 [mm]
  rect 0.354x0.263 smd paste+0 mask+0: 1(-0.254,0) 2(0.254,0)
  body extent -0.3,-0.15 0.3,0.15, height 0.26
5050661222 [mm]
  rect 0.18x0.4 smd: 1(-0.875,-0.95) 2(-0.875,0.95) 3(-0.525,-0.95) 4(-0.525,0.95) 5(-0.175,-0.95) 6(-0.175,0.95) 7(0.175,-0.95) 8(0.175,0.95) 9(0.525,-0.95) 10(0.525,0.95) 11(0.875,-0.95) 12(0.875,0.95)
  rect 0.4x0.385 smd: MP1(-2.155,-0.482) MP2(-2.155,0.482) MP3(2.155,-0.482) MP4(2.155,0.482)
  silkscreen extent -2.3,-1 2.3,1, body extent -2.27,-1 2.27,1, height 0.56
APS12804O-SQRH-WA [mm]
  round 0.19 smd paste+0 mask+0: A1(-0.525,0.525) A2(-0.175,0.525) A3(0.175,0.525) A4(0.525,0.525) B1(-0.525,0.175) B2(-0.175,0.175) B3(0.175,0.175) B4(0.525,0.175) C1(-0.525,-0.175) C2(-0.175,-0.175) C3(0.175,-0.175) C4(0.525,-0.175) D1(-0.525,-0.525) D2(-0.175,-0.525) D3(0.175,-0.525)
  silkscreen extent -1.11,-1.09 1.08,1.11
BGA4C40P2X2_78X78X50 [mm]
  round 0.226 smd: A1(-0.2,0.2) A2(0.2,0.2) B1(-0.2,-0.2) B2(0.2,-0.2)
  body extent -0.39,-0.39 0.39,0.39, height 0.5
BGA5C50P2X3_89X139X50 [mm]
  round 0.226 smd: A1(-0.25,0.5) A2(0.25,0.5) B1(-0.25,0) C1(-0.25,-0.5) C2(0.25,-0.5)
  body extent -0.44,-0.69 0.44,0.69, height 0.5
BGA6C40P3X2_142X89X50 [mm]
  round 0.216 smd: A1(-0.4,0.2) A2(0,0.2) A3(0.4,0.2) B1(-0.4,-0.2) B2(0,-0.2) B3(0.4,-0.2)
  body extent -0.71,-0.44 0.71,0.44, height 0.5
BGA8C50P2X4_89X189X50 [mm]
  round 0.226 smd: A1(-0.25,0.75) A2(0.25,0.75) B1(-0.25,0.25) B2(0.25,0.25) C1(-0.25,-0.25) C2(0.25,-0.25) D1(-0.25,-0.75) D2(0.25,-0.75)
  body extent -0.44,-0.94 0.44,0.94, height 0.5
CAPC6333_33N_KEM-L [mm]
  rect 0.332x0.279 smd paste+0 mask+0: 1(-0.251,0) 2(0.251,0)
  body extent -0.32,-0.17 0.32,0.17, height 0.33
CONN_COMBI_50P [mm] "50Pin 0.4mm pitch connector footprint that accepts (male) connectors intended for different stacking heights:  Hirose - DF40C-50DP-0.4V(51) for 1.5mm - 3mm stacking height , JAE - WP7B-P050VA1-R8000 - for 0.7mm stacking height"
  rect 0.66x0.22 smd: 1(1.355,4.8) 2(1.355,4.4) 3(1.355,4) 4(1.355,3.6) 5(1.355,3.2) 6(1.355,2.8) 7(1.355,2.4) 8(1.355,2) 9(1.355,1.6) 10(1.355,1.2) 11(1.355,0.8) 12(1.355,0.4) 13(1.355,0) 14(1.355,-0.4) 15(1.355,-0.8) 16(1.355,-1.2) 17(1.355,-1.6) 18(1.355,-2) 19(1.355,-2.4) 20(1.355,-2.8) 21(1.355,-3.2) 22(1.355,-3.6) 23(1.355,-4) 24(1.355,-4.4) 25(1.355,-4.8) 26(-1.355,-4.8) 27(-1.355,-4.4) 28(-1.355,-4) 29(-1.355,-3.6) 30(-1.355,-3.2) 31(-1.355,-2.8) 32(-1.355,-2.4) 33(-1.355,-2) 34(-1.355,-1.6) 35(-1.355,-1.2) 36(-1.355,-0.8) 37(-1.355,-0.4) 38(-1.355,0) 39(-1.355,0.4) 40(-1.355,0.8) 41(-1.355,1.2) 42(-1.355,1.6) 43(-1.355,2) 44(-1.355,2.4) 45(-1.355,2.8) 46(-1.355,3.2) 47(-1.355,3.6) 48(-1.355,4) 49(-1.355,4.4) 50(-1.355,4.8)
  rect 0.65x0.35 smd: 56(-1.375,-5.275) 56(-1.375,5.275) 56(1.325,-5.275) 56(1.325,5.275)
  body extent -1.49,-5.74 1.48,5.78, height 1.14
CONN_USB3076-30-A_GCT [mm]
  rect 0.406x1.397 smd paste+0 mask+0: 1(-1.3,2.631) 2(-0.65,2.631) 3(0,2.631) 4(0.65,2.631) 5(1.3,2.631)
  rect 1.143x1.448 smd paste-0.724 mask-0.724: 6(-2.32,2.211) 7(2.32,2.211)
  rect 1.75x1.9 smd paste-0.95 mask-0.953: 8(-1.125,-0.019) 9(1.125,-0.019)
  oval 0.85x1.75 hole 0.45 slot 1.25 at 90 deg mask+0.102: 10(-3.575,-0.019) 11(3.575,-0.019)
  body extent -3.7,-2.78 3.7,2.78, height 2.67
DF522S08H21 [mm]
  rect 0.5x1 smd: 1(-0.4,0.89) 2(0.4,0.89)
  rect 0.9x1.6 smd: 3(-1.65,-1.03) 4(1.65,-1.03)
  silkscreen extent -1.9,-1.74 1.9,1.03, body extent -2.01,-1.74 2.01,1.34, height 1.1
ERTJZEG103FA [mm]
  rect 0.275x0.25 smd: 1(-0.263,0) 2(0.263,0)
  body extent -0.3,-0.15 0.3,0.15, height 0.33
FP-C1005-050-0_15-IPC_B [mm]
  rect 0.705x0.66 smd paste+0 mask+0: 1(-0.427,0) 2(0.427,0)
  body extent -0.5,-0.25 0.5,0.25, height 0.55
FP-C1005-050-0_15-IPC_C [mm]
  rect 0.605x0.56 smd paste+0 mask+0: 1(-0.377,0) 2(0.377,0)
  body extent -0.5,-0.25 0.5,0.25, height 0.55
FP-CL03-IPC_B [mm]
  rect 0.454x0.363 smd paste+0 mask+0: 1(-0.304,0) 2(0.304,0)
  body extent -0.3,-0.15 0.3,0.15, height 0.33
FP-CL05A106MP5NUNC-IPC_B [mm]
  rect 0.756x0.706 smd paste+0 mask+0: 1(-0.425,0) 2(0.425,0)
  body extent -0.5,-0.25 0.5,0.25, height 0.7
FP-CL05A106MP5NUNC-IPC_C [mm]
  rect 0.656x0.606 smd paste+0 mask+0: 1(-0.375,0) 2(0.375,0)
  body extent -0.5,-0.25 0.5,0.25, height 0.7
FP-CL746-IPC_C [mm]
  rect 0.515x0.472 smd paste+0 mask+0: 1(-0.379,0) 2(0.379,0)
  body extent -0.5,-0.25 0.5,0.25, height 0.55
FP-DF40C-40DP-0_4V_51-MFG [mm]
  rect 0.23x0.66 smd paste-1000 mask+0: 1(-3.8,-1.355) 2(-3.8,1.355) 3(-3.4,-1.355) 4(-3.4,1.355) 5(-3,-1.355) 6(-3,1.355) 7(-2.6,-1.355) 8(-2.6,1.355) 9(-2.2,-1.355) 10(-2.2,1.355) 11(-1.8,-1.355) 12(-1.8,1.355) 13(-1.4,-1.355) 14(-1.4,1.355) 15(-1,-1.355) 16(-1,1.355) 17(-0.6,-1.355) 18(-0.6,1.355) 19(-0.2,-1.355) 20(-0.2,1.355) 21(0.2,-1.355) 22(0.2,1.355) 23(0.6,-1.355) 24(0.6,1.355) 25(1,-1.355) 26(1,1.355) 27(1.4,-1.355) 28(1.4,1.355) 29(1.8,-1.355) 30(1.8,1.355) 31(2.2,-1.355) 32(2.2,1.355) 33(2.6,-1.355) 34(2.6,1.355) 35(3,-1.355) 36(3,1.355) 37(3.4,-1.355) 38(3.4,1.355) 39(3.8,-1.355) 40(3.8,1.355)
  rect 0.35x0.66 smd paste+0 mask+0: 41(-4.275,1.355) 42(4.275,1.355) 43(-4.275,-1.355) 44(4.275,-1.355)
  body extent -4.76,-1.49 4.76,1.49, height 1.29
FP-DFE18SAN_E0-MFG [mm]
  rect 0.55x1 smd paste+0 mask+0: 1(-0.625,0) 2(0.625,0)
  body extent -0.8,-0.4 0.8,0.4, height 0.8
FP-DFE201610C-MFG [mm]
  rect 0.8x1.8 smd paste+0 mask+0: 1(-0.8,0) 2(0.8,0)
  body extent -1,-0.8 1,0.8, height 1
FP-ECX-1210-MFG [mm]
  rect 0.575x1.14 smd paste+0 mask+0: 1(-0.413,0) 2(0.413,0)
  body extent -0.8,-0.67 0.8,0.67, height 0.25
FP-GJM033-0_03-IPC_C [mm]
  rect 0.354x0.263 smd paste+0 mask+0: 1(-0.254,0) 2(0.254,0)
  body extent -0.53,-0.27 0.53,0.26, height 0.25
FP-GRM21B-0_2-e0_2_0_7-MFG [mm]
  rect 0.7x1.3 smd paste+0 mask+0: 1(-0.95,0) 2(0.95,0)
  body extent -1,-0.63 1,0.63, height 1.45
FP-GRM033-0_03-IPC_A [mm]
  rect 0.554x0.463 smd paste+0 mask+0: 1(-0.354,0) 2(0.354,0)
  body extent -0.3,-0.15 0.3,0.15, height 0.33
FP-GRM033-0_03-IPC_B [mm]
  rect 0.454x0.363 smd paste+0 mask+0: 1(-0.304,0) 2(0.304,0)
  body extent -0.3,-0.15 0.3,0.15, height 0.33
FP-GRM033-0_03-IPC_C [mm]
  rect 0.354x0.263 smd paste+0 mask+0: 1(-0.254,0) 2(0.254,0)
  body extent -0.53,-0.27 0.53,0.27, height 0.25
FP-GRM033-0_03-MFG [mm]
  rect 0.25x0.3 smd paste+0 mask+0: 1(-0.238,0) 2(0.238,0)
  body extent -0.46,-0.27 0.46,0.27, height 0.25
FP-GRM155-0_2-IPC_C [mm]
  rect 0.628x0.606 smd paste+0 mask+0: 1(-0.389,0) 2(0.389,0)
  body extent -0.5,-0.25 0.5,0.25, height 0.7
FP-LQM18DN_70-IPC_C [mm]
  rect 0.906x0.858 smd paste+0 mask+0: 1(-0.576,0) 2(0.576,0)
  body extent -1.13,-0.58 1.13,0.58, height 0.25
FP-LQP03HQ_02-MFG [mm]
  rect 0.3x0.275 smd paste+0 mask+0: 1(-0.3,0) 2(0.3,0)
  body extent -0.55,-0.27 0.55,0.26, height 0.25
FP-LQW03AW_00-MFG [mm]
  rect 0.21x0.4 smd paste+0 mask+0: 1(-0.22,0) 2(0.22,0)
  body extent -0.43,-0.33 0.43,0.33, height 0.25
FP-RMCF0201-IPC_C [mm]
  rect 0.354x0.263 smd paste+0 mask+0: 1(-0.254,0) 2(0.254,0)
  body extent -0.3,-0.15 0.3,0.15, height 0.26
FP-RMCF0402-IPC_A [mm]
  rect 0.781x0.672 smd paste+0 mask+0: 1(-0.466,0) 2(0.466,0)
  body extent -1.06,-0.54 1.06,0.54, height 0.25
FP-RR0510-IPC_C [mm]
  rect 0.468x0.472 smd paste+0 mask+0: 1(-0.402,0) 2(0.402,0)
  body extent -0.5,-0.25 0.5,0.25, height 0.4
FP-RSV0016A-MFG [mm]
  rrect50% 0.7x0.2 smd paste+0 mask+0: 1(-0.75,0.6)
  rrect50% 0.6x0.2 smd paste+0 mask+0: 2(-0.8,0.2) 3(-0.8,-0.2) 4(-0.8,-0.6) 9(0.8,-0.6) 10(0.8,-0.2) 11(0.8,0.2) 12(0.8,0.6)
  rrect50% 0.2x0.6 smd paste+0 mask+0: 5(-0.6,-1.2) 6(-0.2,-1.2) 7(0.2,-1.2) 8(0.6,-1.2) 13(0.6,1.2) 14(0.2,1.2) 15(-0.2,1.2) 16(-0.6,1.2)
  body extent -1.2,-1.6 1.2,1.6, height 0.25
GAP9 [mm]
  round 0.185 smd paste-0.005 mask+0: A1(-1.575,1.575) A2(-1.225,1.575) A3(-0.875,1.575) A4(-0.525,1.575) A7(0.525,1.575) A8(0.875,1.575) A9(1.225,1.575) A10(1.575,1.575) B1(-1.575,1.225) B2(-1.225,1.225) B3(-0.875,1.225) B4(-0.525,1.225) B5(-0.175,1.225) B6(0.175,1.225) B7(0.525,1.225) B8(0.875,1.225) B9(1.225,1.225) B10(1.575,1.225) C1(-1.575,0.875) C2(-1.225,0.875) C3(-0.875,0.875) C4(-0.525,0.875) C5(-0.175,0.875) C6(0.175,0.875) C7(0.525,0.875) C8(0.875,0.875) C9(1.225,0.875) C10(1.575,0.875) D1(-1.575,0.525) D2(-1.225,0.525) D3(-0.875,0.525) D4(-0.525,0.525) D5(-0.175,0.525) D6(0.175,0.525) D7(0.525,0.525) D8(0.875,0.525) D9(1.225,0.525) D10(1.575,0.525) E1(-1.575,0.175) E2(-1.225,0.175) E3(-0.875,0.175) E4(-0.525,0.175) E5(-0.175,0.175) E6(0.175,0.175) E7(0.525,0.175) E8(0.875,0.175) E9(1.225,0.175) E10(1.575,0.175) F1(-1.575,-0.175) F2(-1.225,-0.175) F3(-0.875,-0.175) F4(-0.525,-0.175) F5(-0.175,-0.175) F6(0.175,-0.175) F7(0.525,-0.175) F8(0.875,-0.175) F9(1.225,-0.175) F10(1.575,-0.175) G1(-1.575,-0.525) G2(-1.225,-0.525) G3(-0.875,-0.525) G4(-0.525,-0.525) G5(-0.175,-0.525) G6(0.175,-0.525) G7(0.525,-0.525) G8(0.875,-0.525) G9(1.225,-0.525) G10(1.575,-0.525) H1(-1.575,-0.875) H2(-1.225,-0.875) H3(-0.875,-0.875) H4(-0.525,-0.875) H5(-0.175,-0.875) H6(0.175,-0.875) H7(0.525,-0.875) H8(0.875,-0.875) H9(1.225,-0.875) H10(1.575,-0.875) J1(-1.575,-1.225) J2(-1.225,-1.225) J3(-0.875,-1.225) J4(-0.525,-1.225) J5(-0.175,-1.225) J6(0.175,-1.225) J7(0.525,-1.225) J8(0.875,-1.225) J9(1.225,-1.225) J10(1.575,-1.225) K1(-1.575,-1.575) K2(-1.225,-1.575) K3(-0.875,-1.575) K4(-0.525,-1.575) K5(-0.175,-1.575) K6(0.175,-1.575) K7(0.525,-1.575) K8(0.875,-1.575) K9(1.225,-1.575) K10(1.575,-1.575)
  silkscreen extent -1.85,-1.85 1.85,1.85, body extent -1.85,-1.85 1.85,1.85, height 0.52
IND_0805_DFE201210S [mm] "0805 Inductor"
  rect 0.8x1.4 smd: 1(-0.8,0) 2(0.8,0)
  body extent -1,-0.64 1,0.64, height 1.02
MMICT5838-00-012 [mm]
  rect 0.522x0.725 smd paste-0.368 mask-0.368: 1(1.37,0.837) 2(0.548,0.837) 6(0.548,-0.837) 7(1.37,-0.837)
  rect 0.051x0.051 smd paste-0.025 mask-0.025: 3(-1.37,0)
  round 0.991 / inner round 1.524 / far side round 0.991 hole 0.991 unplated paste-0.495 mask-0.495: 3(-0.704,0)
  rect 0.3x0.3 smd paste-0.368 mask-0.368: 4(-1.444,1.025) 5(-1.444,-1.025)
  Top Sig/Pwr region: -0.185,0.045 0.106,0.071 0.109,0 0.069,-0.251 -0.046,-0.478 -0.226,-0.658 -0.452,-0.773 -0.704,-0.813 -0.955,-0.773 -1.181,-0.658 -1.361,-0.478 -1.477,-0.251 -1.516,0 -1.513,0.071 -1.222,0.045 -1.224,0 -1.199,-0.161 -1.125,-0.306 -1.01,-0.421 -0.865,-0.495 -0.704,-0.521 -0.543,-0.495 -0.398,-0.421 -0.282,-0.306 -0.208,-0.161 -0.183,0
  Top Sig/Pwr region: -0.185,-0.045 0.106,-0.071 0.109,0 0.069,0.251 -0.046,0.478 -0.226,0.658 -0.452,0.773 -0.704,0.813 -0.955,0.773 -1.181,0.658 -1.361,0.478 -1.477,0.251 -1.516,0 -1.513,-0.071 -1.222,-0.045 -1.224,0 -1.199,0.161 -1.125,0.306 -1.01,0.421 -0.865,0.495 -0.704,0.521 -0.543,0.495 -0.398,0.421 -0.282,0.306 -0.208,0.161 -0.183,0
  body extent -1.74,-1.33 1.76,1.33, height 0.97
MX25UM51345GBEI00 [mm] "WLCSP 68 512 Mbit Flash"
  round 0.25 smd mask-0.02: A1(-2.2,2.8) A12(2.2,2.8) B1(-2.2,2.4) B12(2.2,2.4) D3(-1.4,1.6) D5(-0.6,1.6) D7(0.2,1.6) D9(1,1.6) D11(1.8,1.6) E2(-1.8,1.2) E4(-1,1.2) E6(-0.2,1.2) E8(0.6,1.2) E10(1.4,1.2) F3(-1.4,0.8) F5(-0.6,0.8) F6(-0.2,0.8) F7(0.2,0.8) F8(0.6,0.8) F9(1,0.8) F11(1.8,0.8) G2(-1.8,0.4) G4(-1,0.4) G5(-0.6,0.4) G6(-0.2,0.4) G7(0.2,0.4) G8(0.6,0.4) G9(1,0.4) G10(1.4,0.4) H3(-1.4,0) H4(-1,0) H5(-0.6,0) H6(-0.2,0) H7(0.2,0) H8(0.6,0) H9(1,0) H11(1.8,0) J2(-1.8,-0.4) J4(-1,-0.4) J5(-0.6,-0.4) J6(-0.2,-0.4) J7(0.2,-0.4) J8(0.6,-0.4) J9(1,-0.4) J10(1.4,-0.4) K3(-1.4,-0.8) K4(-1,-0.8) K5(-0.6,-0.8) K6(-0.2,-0.8) K7(0.2,-0.8) K8(0.6,-0.8) K9(1,-0.8) K11(1.8,-0.8) L2(-1.8,-1.2) L4(-1,-1.2) L6(-0.2,-1.2) L8(0.6,-1.2) L10(1.4,-1.2) M2(-1.8,-1.6) M3(-1.4,-1.6) M5(-0.6,-1.6) M7(0.2,-1.6) M9(1,-1.6) M11(1.8,-1.6) P1(-2.2,-2.4) P12(2.2,-2.4) R1(-2.2,-2.8) R12(2.2,-2.8)
  silkscreen extent -2.7,-3.3 2.2,3.3, body extent -2.65,-3.25 2.68,3.25, height 0.51
NanoT160BP [mm]
  round 1.1 hole 0.6: 1(0,0) 2(2.4,0)
  body extent 0.05,-1.5 2.35,0.15, height 0.46
NN03-320 [mm]
  rect 1x1.2 smd: 1(-6.5,-0.6)
  rect 0.5x1.2 smd: 2(-5.25,-0.6) 3(-5.25,-2.4)
  rect 1x1 smd: 4(-0.5,-1.5)
  body extent -7,-3 0,0, height 2.01
NRF5340_WLCSP [mm]
  round 0.19 smd paste+0 mask+0: A1(-1.925,1.75) A2(-1.575,1.75) A3(-1.225,1.75) A5(-0.525,1.75) A7(0.175,1.75) A9(0.875,1.75) A11(1.575,1.75) A12(1.925,1.75) B1(-1.925,1.4) B2(-1.575,1.4) B4(-0.875,1.4) B5(-0.525,1.4) B6(-0.175,1.4) B7(0.175,1.4) B8(0.525,1.4) B9(0.875,1.4) B10(1.225,1.4) B11(1.575,1.4) B12(1.925,1.4) C2(-1.575,1.05) C4(-0.875,1.05) C5(-0.525,1.05) C6(-0.175,1.05) C7(0.175,1.05) C8(0.525,1.05) C9(0.875,1.05) C10(1.225,1.05) C11(1.575,1.05) D1(-1.925,0.7) D2(-1.575,0.7) D10(1.225,0.7) D11(1.575,0.7) D12(1.925,0.7) E2(-1.575,0.35) E3(-1.225,0.35) E4(-0.875,0.35) E5(-0.525,0.35) E6(-0.175,0.35) E7(0.175,0.35) E8(0.525,0.35) E10(1.225,0.35) E11(1.575,0.35) F1(-1.925,0) F2(-1.575,0) F3(-1.225,0) F5(-0.525,0) F6(-0.175,0) F7(0.175,0) F8(0.525,0) F10(1.225,0) F11(1.575,0) F12(1.925,0) G2(-1.575,-0.35) G3(-1.225,-0.35) G5(-0.525,-0.35) G6(-0.175,-0.35) G7(0.175,-0.35) G8(0.525,-0.35) G10(1.225,-0.35) G11(1.575,-0.35) H1(-1.925,-0.7) H2(-1.575,-0.7) H3(-1.225,-0.7) H10(1.225,-0.7) H11(1.575,-0.7) H12(1.925,-0.7) J2(-1.575,-1.05) J3(-1.225,-1.05) J4(-0.875,-1.05) J5(-0.525,-1.05) J6(-0.175,-1.05) J7(0.175,-1.05) J8(0.525,-1.05) J9(0.875,-1.05) J10(1.225,-1.05) J11(1.575,-1.05) K1(-1.925,-1.4) K2(-1.575,-1.4) K3(-1.225,-1.4) K4(-0.875,-1.4) K5(-0.525,-1.4) K6(-0.175,-1.4) K7(0.175,-1.4) K8(0.525,-1.4) K9(0.875,-1.4) K10(1.225,-1.4) K11(1.575,-1.4) K12(1.925,-1.4) L1(-1.925,-1.75) L3(-1.225,-1.75) L5(-0.525,-1.75) L7(0.175,-1.75) L9(0.875,-1.75) L11(1.575,-1.75) L12(1.925,-1.75)
  silkscreen extent -2.27,-2.07 2.27,2.06, body extent -2.18,-1.98 2.18,1.98, height 0.5
ONSC-DSN-2-512AB-01_V [mm] "DSN, 2-Leads, Body 1.6x0.8mm"
  rect 0.7x0.52 smd: 1(0,0.64)
  rect 0.7x1.05 smd: 2(0,-0.275)
  body extent -0.4,-0.8 0.4,0.8, height 0.31
QFN_DUXS12_STM [mil]
  rect 12x11 smd paste+0 mask+0: 1(-29.5,29.54) 2(-29.5,9.85) 3(-29.5,-9.85) 4(-29.5,-29.53) 7(29.5,-29.53) 8(29.5,-9.85) 9(29.5,9.85) 10(29.5,29.54)
  rect 11x12 smd paste+0 mask+0: 5(-9.84,-29.5) 6(9.85,-29.5) 11(9.85,29.5) 12(-9.84,29.5)
  body extent -41,-41 41,41, height 29
RESC0201(0603)_L [mm] "Chip Resistor, Body 0.6x0.3mm, IPC High Density"
  rect 0.35x0.35 smd: 1(-0.3,0) 2(0.3,0)
  body extent -0.31,-0.16 0.31,0.16, height 0.3
RESC0603X26X15LL03T05 [mm] "Chip Resistor, 2-Leads, Body 0.60x0.30mm, IPC High Density"
  rect 0.35x0.25 smd: 1(-0.275,0) 2(0.275,0)
  body extent -0.32,-0.16 0.31,0.17, height 0.26
RESC0603X28X15ML05T05 [mm] "Chip Resistor, 2-Leads, Body 0.60x0.30mm, IPC Low Density"
  rect 0.55x0.45 smd: 1(-0.375,0) 2(0.375,0)
  body extent -0.33,-0.17 0.33,0.18, height 0.28
RESC1005X40X25LL05T10 [mm] "Chip Resistor, 2-Leads, Body 1.00x0.50mm, IPC High Density"
  rect 0.5x0.45 smd: 1(-0.375,0) 2(0.375,0)
  body extent -0.53,-0.27 0.53,0.28, height 0.4
SML-LX0404SIUPGUSB [mm]
  rrect50% 0.45x0.45 smd: 1(-0.425,0.425)
  rect 0.45x0.45 smd: 2(0.425,0.425) 3(0.425,-0.425) 4(-0.425,-0.425)
  body extent -0.5,-0.5 0.5,0.5, height 0.25
SOT1226-3 [mm]
  rect 0.18x0.18 smd paste+0 mask+0: 1(-0.26,-0.35) 2(0.26,-0.35) 4(0.26,0.35) 5(-0.26,0.35)
  rect 0.28x0.28 smd rot 45 paste+0 mask+0: 3(0,0)
  Top Sig/Pwr region: 0.38,-0.48 0.38,-0.16 0.265,-0.16 0.12,-0.305 0.12,-0.48
  Top Sig/Pwr region: -0.38,0.48 -0.38,0.16 -0.265,0.16 -0.12,0.305 -0.12,0.48
  Top Sig/Pwr region: -0.38,-0.48 -0.38,-0.16 -0.265,-0.16 -0.12,-0.305 -0.12,-0.48
  Top Sig/Pwr region: 0.38,0.48 0.38,0.16 0.265,0.16 0.12,0.305 0.12,0.48
  body extent -0.4,-0.4 0.4,0.4, height 0.37
TPD1E01B04DPYRQ1 [mm]
  rect 0.3x0.5 smd: 1(-0.35,0) 2(0.35,0)
  body extent -0.5,-0.3 0.5,0.3, height 0.55
U.FL-R-SMT-1(01)_GND_pad_small [mm]
  rect 0.7x1.75 smd: 1(0,0) 1(2.6,0)
WLCSP32_APS512XXN-OB9-WB [mm]
  round 0.23 smd mask-0.02: A1(-1.4,0.6) A2(-1,0.6) A3(-0.6,0.6) A4(-0.2,0.6) A5(0.2,0.6) A6(0.6,0.6) A7(1,0.6) A8(1.4,0.6) B1(-1.4,0.2) B2(-1,0.2) B3(-0.6,0.2) B4(-0.2,0.2) B5(0.2,0.2) B6(0.6,0.2) B7(1,0.2) B8(1.4,0.2) C1(-1.4,-0.2) C2(-1,-0.2) C3(-0.6,-0.2) C4(-0.2,-0.2) C5(0.2,-0.2) C6(0.6,-0.2) C7(1,-0.2) C8(1.4,-0.2) D1(-1.4,-0.6) D2(-1,-0.6) D3(-0.6,-0.6) D4(-0.2,-0.6) D5(0.2,-0.6) D6(0.6,-0.6) D7(1,-0.6) D8(1.4,-0.6)
  silkscreen extent -1.9,-1.4 1.9,1.4, body extent -1.85,-1.34 1.88,1.39, height 0.51
WLCSP_5_2-1-2_P0.4 [mm]
  round 0.2 smd paste+0 mask+0: A1(-0.4,-0.2) A2(-0.4,0.2) B1(0,0) C1(0.4,-0.2) C2(0.4,0.2)
  body extent -0.6,-0.38 0.6,0.38, height 0.57
WLCSP_8_P0.4 [mm]
  round 0.2 smd mask+0: A1(0,0) A2(0.4,0) B1(0,-0.4) B2(0.4,-0.4) C1(0,-0.8) C2(0.4,-0.8) D1(0,-1.2) D2(0.4,-1.2)
  body extent -0.3,-1.4 0.7,0.2, height 0.41
WLP_30_MAX77654 [mm]
  round 0.22 smd paste+0 mask+0: A1(0,0) A2(0.4,0) A3(0.8,0) A4(1.2,0) A5(1.6,0) A6(2,0) B1(0,-0.4) B2(0.4,-0.4) B3(0.8,-0.4) B4(1.2,-0.4) B5(1.6,-0.4) B6(2,-0.4) C1(0,-0.8) C2(0.4,-0.8) C3(0.8,-0.8) C4(1.2,-0.8) C5(1.6,-0.8) C6(2,-0.8) D1(0,-1.2) D2(0.4,-1.2) D3(0.8,-1.2) D4(1.2,-1.2) D5(1.6,-1.2) D6(2,-1.2) E1(0,-1.6) E2(0.4,-1.6) E3(0.8,-1.6) E4(1.2,-1.6) E5(1.6,-1.6) E6(2,-1.6)
  body extent -0.4,-1.97 2.4,0.37, height 0.51
XTAL_ECS-240-10-47Q-CES-TR [mm]
  rect 0.75x0.65 smd: 1(-0.525,-0.375) 2(0.525,-0.375) 3(0.525,0.375) 4(-0.525,0.375)
  body extent -0.8,-0.6 0.8,0.6, height 0.41
Y_ECX-1048 [mm]
  rect 0.52x0.47 smd: 1(-0.41,-0.335) 2(0.41,-0.335) 3(0.41,0.335) 4(-0.41,0.335)
  body extent -0.6,-0.5 0.6,0.5, height 0.3